# EAGLE board uvi-2.1 (EAGLE 7.3.0)
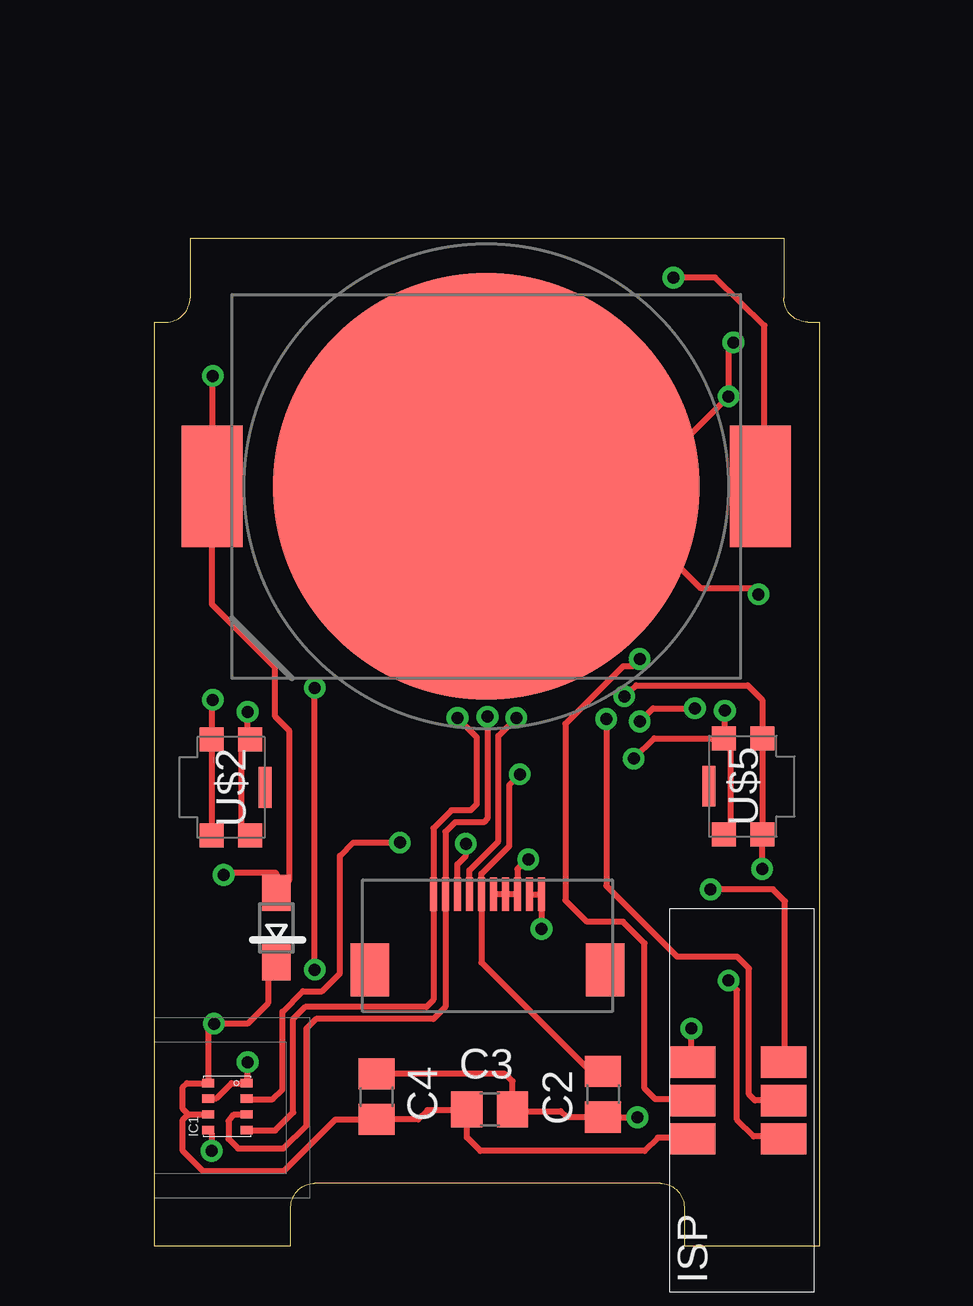
[diagram p0: board, top side]
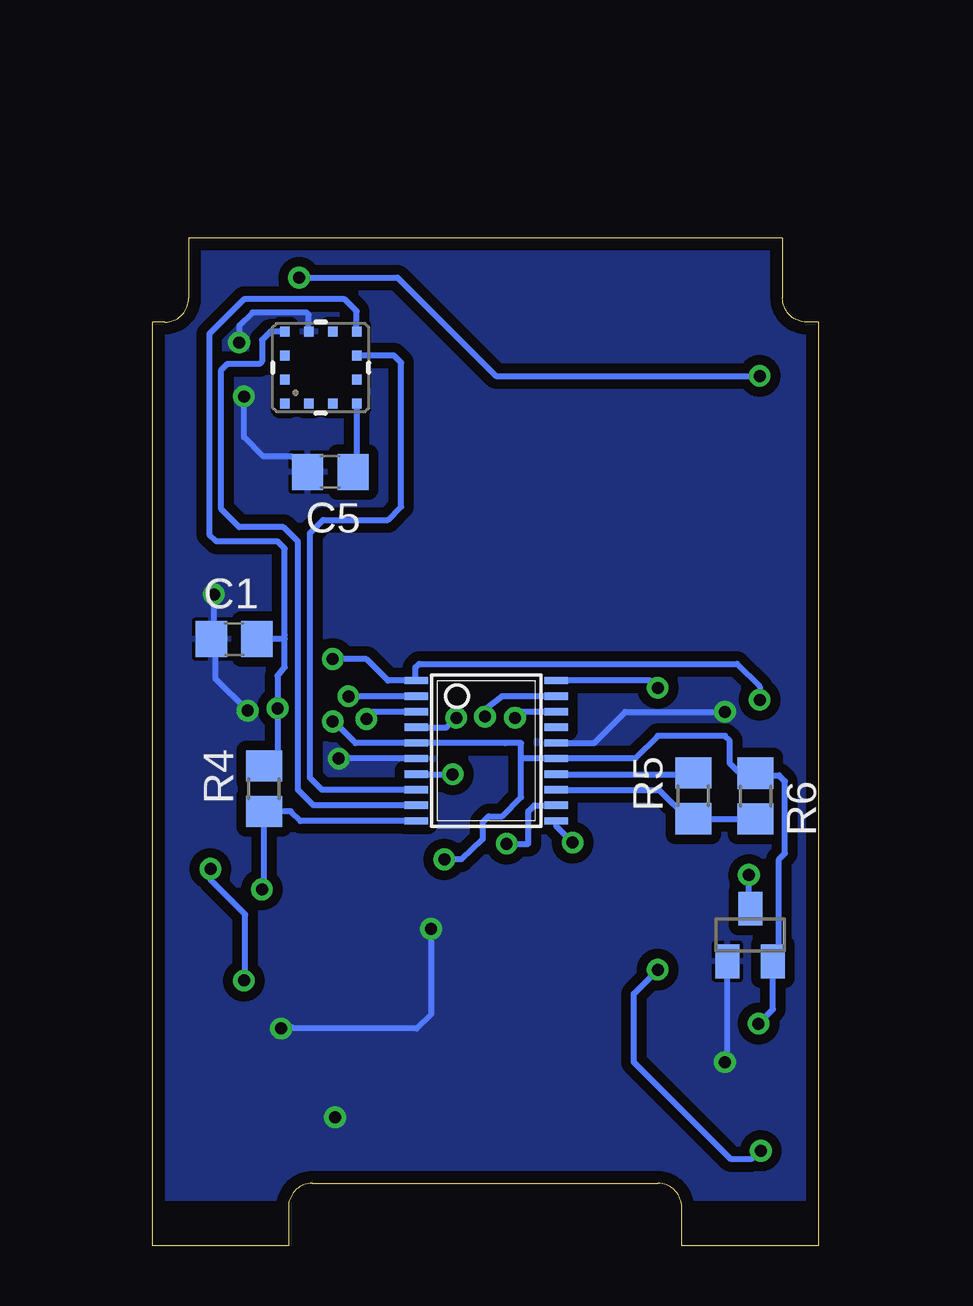
[diagram p1: board, bottom side, seen from below]

Size 27.75 x 42 mm. Coordinates in mm from the lower left corner, seen from the top.
Outline: 0,0 5.7,0 5.7,1.6 arc-90 6.7,2.6 21.1,2.6 arc-90 22.1,1.6 22.1,0 27.75,0 27.75,38.5 27.25,38.5 arc-90 26.25,39.5 26.25,42 1.5,42 1.5,39.5 arc-90 0.5,38.5 0,38.5 0,0
Copper layers (1*16): Top 0.035mm / dielectric 0.5mm / Bottom 0.035mm
Design rules "NYAKARUHAZ *": minimum track width 6mil, minimum drill 19mil, track to track 6mil, track to pad 6mil, pad to pad 6mil, via to via 10mil, smd to smd 6mil, copper to edge 20mil, drill to drill 8mil, minimum pad ring 10mil, minimum via ring 8mil, stop-mask expansion 4mil, vias tented up to drill 25mil, thermal gap 6mil
bRestrict: area 19.9,35.9 to 21.6,37.5

## Footprints (pad centres in the part's own frame; a part is rotated, then mirrored left to right if it is on the bottom)
C0805 = smd 1.3 x 1.5: 1 -0.95,0; 2 0.95,0
SOD323-W = smd 1.5 x 1.2: A 1.45,0; C -1.45,0
BMP280 = smd 0.35 x 0.5: 1 0.975,-0.8; 2 0.325,-0.8; 3 -0.325,-0.8; 4 -0.975,-0.8; 5 -0.975,0.8; 6 -0.325,0.8; 7 0.325,0.8; 8 0.975,0.8
SOT23 = smd 1 x 1.4: 1 -0.95,-1.1; 2 0.95,-1.1; 3 0,1.1
R0805 = smd 1.3 x 1.5: 1 -0.95,0; 2 0.95,0
ML8511 = smd 0.4 x 0.4: 1 -1.5,-1.5; 2 -1.5,-0.5; 3 -1.5,0.5; 4 -1.5,1.5; 5 -0.5,1.5; 6 0.5,1.5; 7 1.5,1.5; 8 1.5,0.5; 9 1.5,-0.5; 10 1.5,-1.5; 11 0.5,-1.5; 12 -0.5,-1.5
BAT-HLD-002 = smd 2.54 x 5.08: P$1+ -11.43,0; P$2+ 11.43,0 | smd 17.78 x 17.78: P$3- 0,0
C&K-KMS-SWITCH = smd 1 x 1: 1 -2,-0.8; 2 -2,0.8; 4 2,0.8; 5 2,-0.8 | smd 1.7 x 0.55: 3 0,1.425
TSSOP20 = smd 0.305 x 0.991: 1 -2.925,-2.918; 2 -2.275,-2.918; 3 -1.625,-2.918; 4 -0.975,-2.918; 5 -0.325,-2.918; 6 0.325,-2.918; 7 0.975,-2.918; 8 1.625,-2.918; 9 2.275,-2.918; 10 2.925,-2.918; 11 2.925,2.918; 12 2.275,2.918; 13 1.625,2.918; 14 0.975,2.918; 15 0.325,2.918; 16 -0.325,2.918; 17 -0.975,2.918; 18 -1.625,2.918; 19 -2.275,2.918; 20 -2.925,2.918
ISP-TARGET = smd 1.3 x 1.9: P$GND 1.6,1.9; P$MISO -1.6,-1.9; P$MOSI 0,1.9; P$RESET 1.6,-1.9; P$SCK 0,-1.9; P$VCC -1.6,1.9
FPC-10-BTM = smd 0.3 x 1.4: P$1 -2.25,3.15; P$2 -1.75,3.15; P$3 -1.25,3.15; P$4 -0.75,3.15; P$5 -0.25,3.15; P$6 0.25,3.15; P$7 0.75,3.15; P$8 1.25,3.15; P$9 1.75,3.15; P$10 2.25,3.15 | smd 1.6 x 2.2: P$F1 -4.9,0; P$F2 4.9,0

## Placement (x,y rotation side)
C1  100n  [C0805]  24.36,25.28 0 bottom
C2  100n  [C0805]  18.72,6.31 90 top
C3  100n  [C0805]  13.99,5.68 0 top
C4  100n  [C0805]  9.28,6.21 270 top
C5  1n  [C0805]  20.35,32.25 180 bottom
D1  BAS16WS  [SOD323-W]  5.1,13.25 90 top
IC1  BME280  [BMP280]  3.05,5.8 90 top
Q1  IRLML6401PBF  [SOT23]  2.85,12.95 0 bottom
R4  20k  [R0805]  23.12,19.05 90 bottom
R5  10k 1%  [R0805]  5.22,18.75 90 bottom
R6  20k 1%  [R0805]  2.63,18.74 270 bottom
U1  ML8511-UV-SENSORSMD  [ML8511]  20.75,36.6 0 bottom
U$1  CR2016  [BAT-HLD-002]  13.85,31.65 0 top
U$2  KMSXXXG  [C&K-KMS-SWITCH]  3.2,19.1 270 top
U$3  ATTINY861A  [TSSOP20]  13.85,20.63 270 bottom
U$4  ISP-CONNTARGET!  [ISP-TARGET]  24.35,6.05 90 top
U$5  KMSXXXG  [C&K-KMS-SWITCH]  24.55,19.15 90 top
X1  FPC-10  [FPC-10-BTM]  13.9,11.5 0 top

## Library data of the parts
C1-C5 R4-R6 = rcl
D1 Q1 U$1 U$3 U$4 X1 = _myLIB
IC1 = bosch-bmp280
U1 = SparkFun-Sensors; PROD_ID: IC-11927
U$2 U$5 = domestichacks

## Nets
GND: C1.1 C2.1 C3.2 C4.1 C5.2 IC1.1 IC1.7 Q1.1 U1.5 U$1.P$3- U$2.2 U$2.4 U$3.6 U$3.16 U$4.P$GND U$5.2 U$5.4 X1.P$9 X1.P$10
N$1: D1.A Q1.3 U$1.P$1+ U$1.P$2+
N$2: R4.1 U$3.10 U$4.P$RESET
N$3: IC1.5 U$3.20
N$4: R5.2 U$3.14
N$5: IC1.4 U$3.18 X1.P$1
N$6: C5.1 U1.10
N$7: IC1.3 U$3.19 X1.P$2
N$8: U1.8 U$3.8
N$9: C2.2 U$3.7 X1.P$5
N$11: U$3.2 U$4.P$MISO U$5.1 U$5.5
N$13: U$3.3 U$4.P$SCK
N$14: IC1.2 U$3.11
N$15: U$3.4 X1.P$4
N$16: U$3.12 X1.P$3
N$20: U$2.1 U$2.5 U$3.1 U$4.P$MOSI
N$21: U1.4 U$3.9
N$22: R5.1 R6.2 U$3.13
VCC: C1.2 C3.1 C4.2 D1.C IC1.6 IC1.8 Q1.2 R4.2 R6.1 U1.7 U$3.5 U$3.15 U$4.P$VCC X1.P$6 X1.P$7 X1.P$8

## Tracks (layer width: path | path; a pad name or v marks a point on that pad's centre or on a via)
GND  (via drill 0.5 pad 0.61)
  Top 0.254: v22.4,9.05 22.4,7.7 U$4.P$GND | IC1.7 2.27,6.15 2.6,6.15 3.23,6.78 IC1.1 3.9,6.83 v3.9,7.65 | C4.1 14.64,7.16 14.95,6.85 C3.2 15.02,5.6 16.95,5.6 17.19,5.36 C2.1 v20.15,5.35 | U$2.4 3.65,17.45 3.65,20.7 4,21.05 U$2.2 3.9,21.2 v3.9,22.25 | X1.P$9 X1.P$10 v16.15,13.2 | U$5.2 24.05,17.45 24.05,20.7 23.75,21 U$5.4 | v20,20.3 20.85,21.15 U$5.4 | U$5.4 23.8,21.2 v23.8,22.3 | 20.2,31.65 v23.95,35.4 23.95,37.65 v24.15,37.65 | 20.2,31.65 U$1.P$3- | v25.2,27.15 24.95,27.4 22.8,27.4 20.2,30 20.2,31.65
  Bottom 0.254: 21.95,9.1 22.35,9.1 v22.4,9.05 16.75,9.05 16.15,9.65 v16.15,13.2 | v20.15,5.35 20.3,5.35 | v3.9,7.65 3.8,7.75 Q1.1 | U$3.16 9.35,20.95 8.05,22.25 v3.9,22.25 | U$3.6 v20,20.3 | v23.8,22.3 25.15,23.65 25.15,24.97 C1.1 25.2,25.39 v25.2,27.15 | C5.2 21.95,32.9 23.15,32.9 23.95,33.7 v23.95,35.4 | U1.5 21.25,38.8 21.35,38.9 23.6,38.9 24.15,38.35 v24.15,37.65
  pour Bottom (isolate 0.406): 0.25,41.55 27.35,41.55 27.35,2 0.25,2
N$1  (via drill 0.5 pad 0.61)
  Top 0.254: 25.3,31.67 U$1.P$2+ 25.45,31.82 25.45,38.35 23.4,40.35 v21.65,40.35 | v2.9,15.45 3,15.55 5.05,15.55 5.1,15.5 D1.A 5.65,15.25 5.65,21.45 5.05,22.05 5.05,24.1 2.42,26.73 U$1.P$1+ 2.42,36.22 v2.45,36.25
  Bottom 0.254: Q1.3 2.9,14.1 v2.9,15.45 | v21.65,40.35 17.55,40.35 13.45,36.25 v2.45,36.25
N$2  (via drill 0.5 pad 0.61)
  Top 0.254: U$4.P$RESET 26.3,7.7 26.3,14.35 25.8,14.85 v23.2,14.85
  Bottom 0.254: U$3.10 21.6,17.7 22,18.1 R4.1 23.12,14.93 v23.2,14.85
N$3  (via drill 0.5 pad 0.61)
  Top 0.254: IC1.5 2.4,4.67 v2.4,3.95 | v6.7,11.5 v6.7,23.25
  Bottom 0.254: v2.4,3.95 2.8,3.6 3.65,3.6 7.7,7.65 7.7,10.5 v6.7,11.5 | v6.7,23.25 7,23.55 U$3.20
N$4
  Bottom 0.254: U$3.14 5.75,19.65 5.7,19.7 R5.2
N$5  (via drill 0.5 pad 0.61)
  Top 0.254: v12.65,22 13.45,21.2 13.45,18.4 13.2,18.15 12.4,18.15 11.65,17.4 X1.P$1 11.65,10.25 11.35,9.95 6.3,9.95 5.8,9.45 5.8,5.55 5.05,4.8 3.88,4.8 IC1.4
  Bottom 0.254: U$3.18 12.4,22.25 v12.65,22
N$6
  Bottom 0.254: U1.10 19.25,32.85 19.4,32.7 C5.1
N$7  (via drill 0.5 pad 0.61)
  Top 0.254: v13.9,22.05 13.9,17.8 13.75,17.65 12.55,17.65 12.15,17.25 X1.P$2 12.15,9.95 11.65,9.45 6.75,9.45 6.35,9.05 6.35,5 5.4,4.05 3.5,4.05 3.1,4.45 3.1,5.2 3.3,5.45 3.83,5.45 IC1.3
  Bottom 0.254: U$3.19 13.2,22.9 13.9,22.35 v13.9,22.05
N$8
  Bottom 0.254: U$3.8 20.7,19 21.2,19.5 21.2,29.7 20.65,30.25 17.95,30.25 17.4,30.8 17.4,36.8 17.7,37.1 U1.8
N$9  (via drill 0.5 pad 0.61)
  Top 0.254: v15.25,19.65 14.8,19.2 14.8,16.65 13.65,15.5 X1.P$5 13.65,11.8 18.19,7.26 C2.2
  Bottom 0.254: U$3.7 v15.25,19.65
N$11  (via drill 0.5 pad 0.61)
  Top 0.254: v19.6,22.9 20.1,23.35 24.75,23.35 25.35,22.75 U$5.5 U$5.1 v25.35,15.7 | U$4.P$MISO 26.15,4.55 25,4.55 24.3,5.25 24.3,10.65 23.95,11 v23.95,11.05
  Bottom 0.254: U$3.2 v19.6,22.9 | v23.95,11.05 23.9,11.1 23.9,13.8 25.35,15.25 v25.35,15.7
N$13  (via drill 0.5 pad 0.61)
  Top 0.254: v18.85,21.95 18.85,15 21.8,12.05 24.3,12.05 24.8,11.55 24.8,6.3 25.05,6.05 U$4.P$SCK
  Bottom 0.254: U$3.3 18.55,22.25 v18.85,21.95
N$14  (via drill 0.5 pad 0.61)
  Top 0.254: IC1.2 3.88,6.1 4.95,6.1 5.35,6.5 5.35,9.75 6.2,10.6 7,10.6 7.75,11.35 7.75,16.25 8.3,16.8 v10.25,16.8
  Bottom 0.254: v10.25,16.8 10.93,17.48 U$3.11
N$15  (via drill 0.5 pad 0.61)
  Top 0.254: X1.P$4 13.15,15.65 14.35,16.85 14.35,21.25 v15.1,22
  Bottom 0.254: U$3.4 15.5,21.6 v15.1,22
N$16  (via drill 0.5 pad 0.61)
  Top 0.254: X1.P$3 12.65,15.9 13,16.25 v13,16.75
  Bottom 0.254: v13,16.75 12.1,16.75 12.1,18.1 11.85,18.36 U$3.12
N$20  (via drill 0.5 pad 0.61)
  Top 0.254: U$4.P$MOSI 22.4,6.1 20.9,6.1 20.45,6.55 20.45,12.6 19.55,13.5 18.05,13.5 17.15,14.4 17.15,21.75 19.55,24.15 19.95,24.15 v20.25,24.45 | v2.45,22.75 2.4,22.7 U$2.1 U$2.5
  Bottom 0.254: v20.25,24.45 18.85,24.45 17.95,23.55 U$3.1 16.8,23.59 16.8,24.1 16.65,24.25 3.4,24.25 2.45,23.3 v2.45,22.75
N$21
  Bottom 0.254: U$3.9 21.05,18.35 21.7,19 21.7,29.35 22.3,29.95 24.15,29.95 24.9,30.7 24.9,36.5 24.65,36.75 23.3,36.75 23.2,36.85 23.2,37.75 22.85,38.1 U1.4
N$22
  Bottom 0.254: U$3.13 6.65,19 5.45,17.8 R5.1 R6.2
VCC  (via drill 0.5 pad 0.61)
  Top 0.254: U$4.P$VCC 22.4,4.5 21,4.5 20.45,3.95 13.6,3.95 13.04,4.51 C3.1 13.01,5.65 11.4,5.65 11.01,5.26 C4.2 7.55,5.25 5.4,3.1 2.05,3.1 1.2,3.95 1.2,5.25 1.43,5.47 IC1.6 2.23,5.45 1.45,5.45 1.2,5.7 1.2,6.6 1.38,6.78 IC1.8 2.25,9 v2.5,9.25 3.9,9.25 4.75,10.1 4.75,11.45 D1.C | X1.P$6 X1.P$7 X1.P$8 15.15,15.7 15.55,16.1 v15.6,16.1 | v20.25,21.85 20.8,22.4 v22.55,22.4
  Bottom 0.254: 12.4,20.3 U$3.15 7.64,20.3 6.7,21.25 3.9,21.25 3.7,21.05 3.7,20.1 3.35,19.75 2.29,19.75 R6.1 2.14,19.6 1.65,19.6 1.4,19.35 1.4,16.35 1.65,16.1 1.65,12.35 1.6,12.3 1.85,12.3 1.9,12.35 Q1.2 1.9,9.85 v2.5,9.25 | v15.6,16.1 14.9,16.1 14,16.95 14,17.65 13.75,17.9 13.2,17.9 12.4,18.7 12.4,20.3 | v20.25,21.85 20.2,21.85 19.3,20.95 U$3.5 13.05,20.95 12.4,20.95 12.4,20.3 | R4.2 22.65,20 22.55,20.1 v22.55,22.4 22.55,23.75 22.26,24.11 22.25,24.11 22.25,25.3 | U1.7 19.25,38.95 19.75,39.45 23.95,39.45 25.4,38 25.4,29.65 25.1,29.35 22.55,29.35 22.25,29.05 22.25,25.46 22.26,25.45 22.25,25.3 | C1.2 23.39,25.3 22.25,25.3